# Altium PCB PCB1.pcbdoc
Units mil, origin at the board's own origin, x right, y up, seen from the top; angles counter-clockwise.
Board outline 2469.25 x 4325 mil, 2 copper layers (Top Layer, Bottom Layer); 51 components, 39 nets, 196 pads, 37 vias.
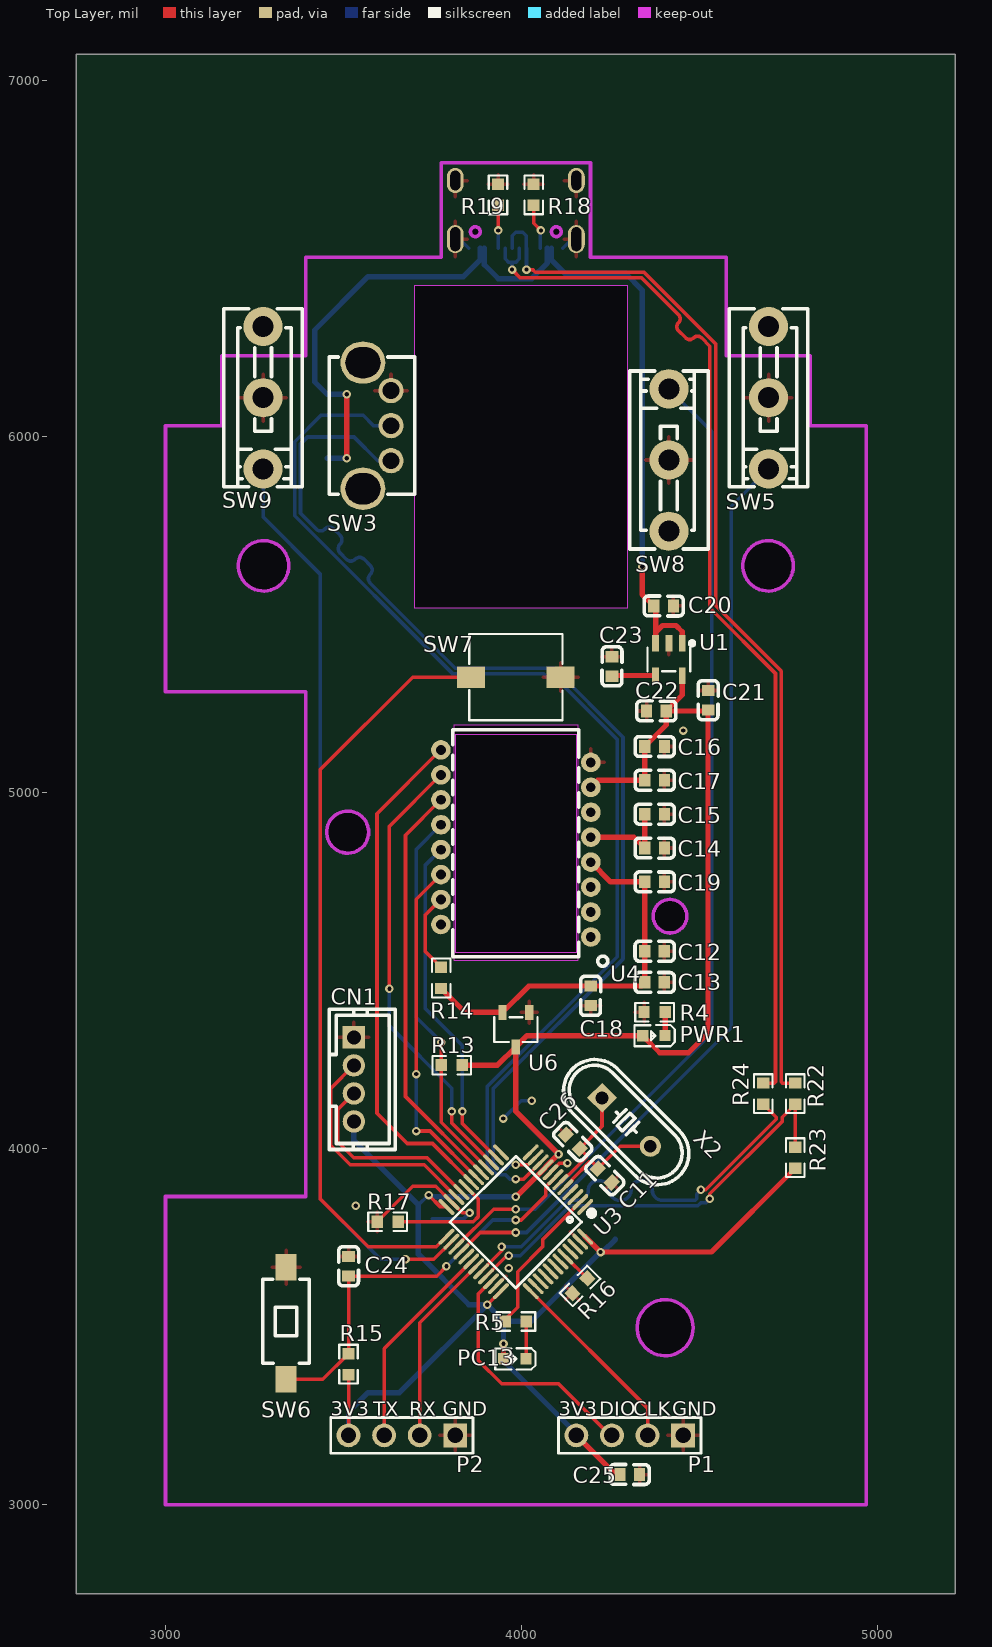
[diagram p0: Top Layer view]
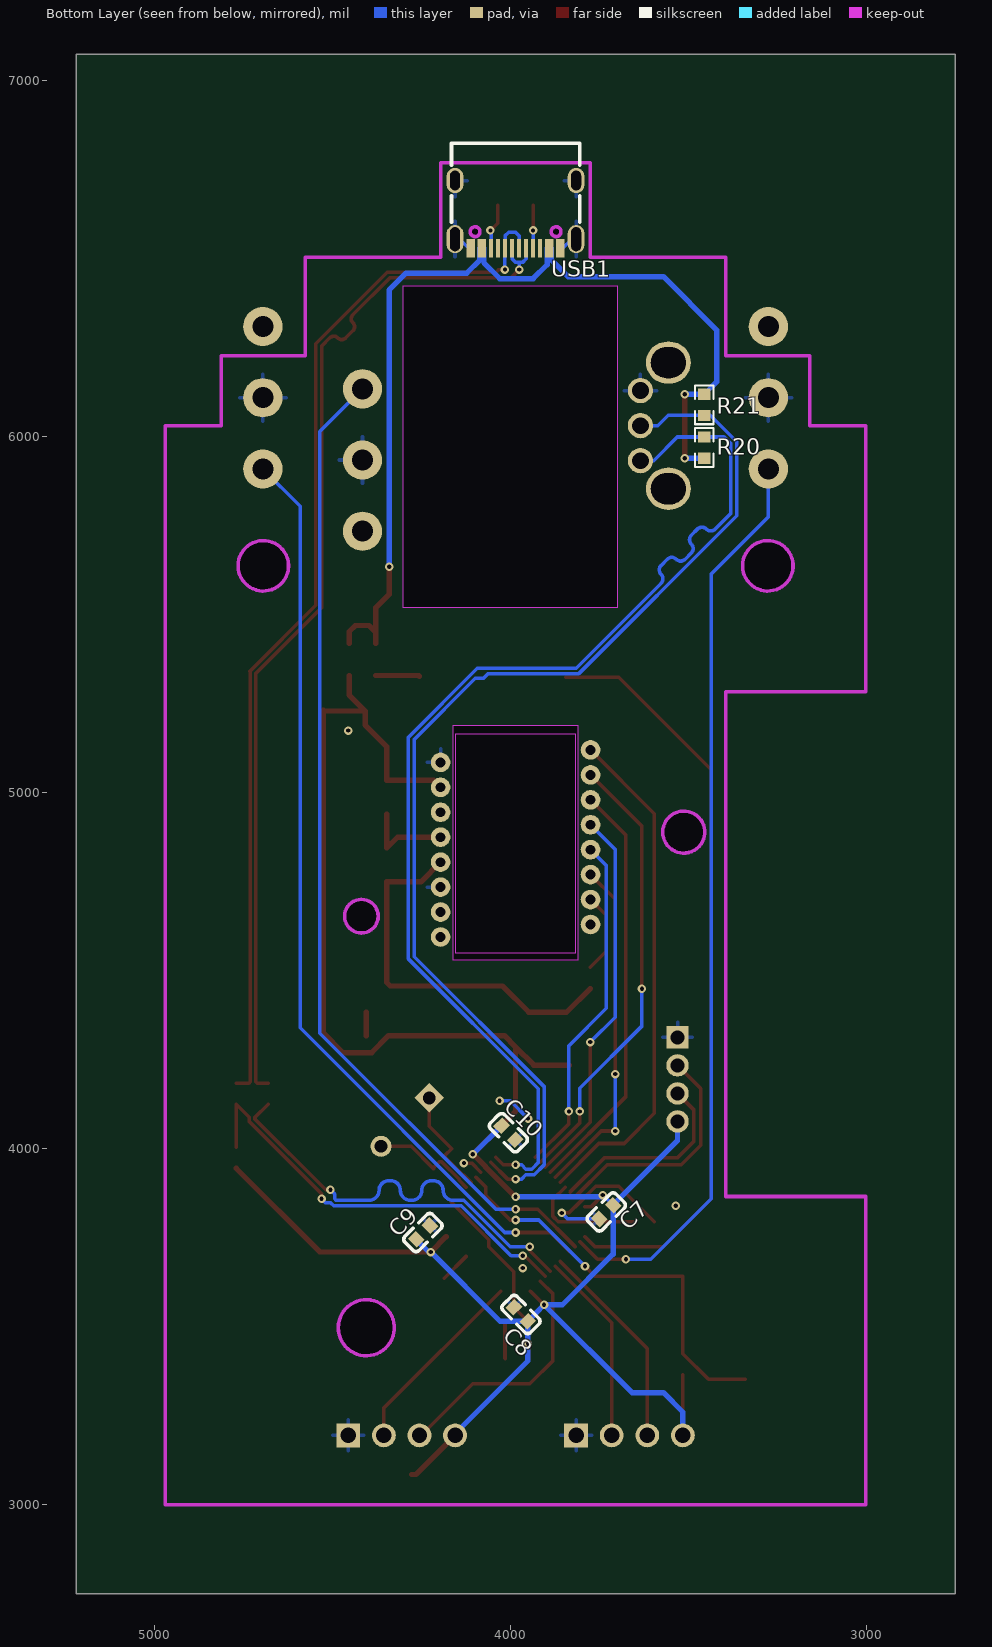
[diagram p1: Bottom Layer view, seen from below]

## Layer stack, top to bottom
Top Layer: signal copper (thickness not stored)
Dielectric: dielectric 12.6, FR-4, Dk 4.8
Bottom Layer: signal copper (thickness not stored)

## Board outline
5219.25,2750 2750,2750 2750,7075 5219.25,7075
cut-out: 4764.53,5637.8 ccw(c4693.66,5637.22) 4622.8,5637.8 ccw(c4693.66,5638.37)
cut-out: 3347.2,5637.8 ccw(c3276.34,5637.8) 3205.47,5637.8 ccw(c3276.34,5637.8)
cut-out: 3571.61,4889.76 ccw(c3512.56,4889.76) 3453.5,4889.76 ccw(c3512.56,4889.76)
cut-out: 4465.31,4653.54 ccw(c4418.07,4653.15) 4370.83,4653.54 ccw(c4418.07,4653.93)
cut-out: 4483.07,3497.44 ccw(c4404.33,3497.44) 4325.59,3497.44 ccw(c4404.33,3497.44)
cut-out: 3700.04,5519.69 4299.96,5519.69 4299.96,6425.2 3700.04,6425.2
cut-out: 3810,4530 4160,4530 4160,5190 3810,5190

## Design rules (kind name [scope] priority, off if disabled: settings)
Clearance copperThickness1oz [All] p1: gap=7 ignorepadtopadclearanceinfootprint=FALSE except(4: Track-Track; 6: Track-SMDPad SMDPad-SMDPad Track-THPad SMDPad-THPad THPad-THPad Track-Via SMDPad-Via THPad-Via Via-Via Track-Fill SMDPad-Fill THPad-Fill Via-Fill Fill-Fill SMDPad-Region THPad-Region Via-Region Fill-Region Region-Region Track-Poly SMDPad-Poly THPad-Poly Via-Poly Fill-Poly Poly-Poly Track-Text SMDPad-Text THPad-Text Via-Text Fill-Text Region-Text Poly-Text Text-Text Track-Hole SMDPad-Hole THPad-Hole Via-Hole Fill-Hole Region-Hole Poly-Hole Text-Hole; 11.8: Track-Region Region-Poly Track-Sheet SMDPad-Sheet THPad-Sheet Via-Sheet Fill-Sheet Region-Sheet Poly-Sheet Text-Sheet Sheet-Hole)
Clearance copperThickness2oz [All] p1: gap=7 ignorepadtopadclearanceinfootprint=FALSE except(6: Track-SMDPad SMDPad-SMDPad Track-THPad SMDPad-THPad THPad-THPad Track-Via SMDPad-Via THPad-Via Via-Via Track-Fill SMDPad-Fill THPad-Fill Via-Fill Fill-Fill SMDPad-Region THPad-Region Via-Region Fill-Region Region-Region Track-Poly SMDPad-Poly THPad-Poly Via-Poly Fill-Poly Poly-Poly Track-Text SMDPad-Text THPad-Text Via-Text Fill-Text Region-Text Poly-Text Text-Text Track-Hole SMDPad-Hole THPad-Hole Via-Hole Fill-Hole Region-Hole Poly-Hole Text-Hole; 8: Track-Track; 11.8: Track-Region Region-Poly Track-Sheet SMDPad-Sheet THPad-Sheet Via-Sheet Fill-Sheet Region-Sheet Poly-Sheet Text-Sheet Sheet-Hole)
DiffPairsRouting differentialPair [All] p1: maxuncoupledlength=10 maxlimit=6 mostfreqgap=6 toplayer_minwidth=5 toplayer_prefwidth=10 toplayer_maxwidth=100 bottomlayer_minwidth=5 bottomlayer_prefwidth=10 bottomlayer_maxwidth=100
PasteMaskExpansion pasteMaskExpansion [All] p1:
PlaneConnect innerPlane [All] p1: planeconnectstyle=Relief reliefexpansion=20 reliefentries=4 reliefconductorwidth=10 reliefairgap=10
PolygonConnect copperRegion [All] p1: connectstyle=Relief reliefentries=4 reliefconductorwidth=10 polygonreliefangle="90 Angle" airgapwidth=10
RoutingVias viaSize [All] p1: viastyle="Through Hole" holewidth=12.0078 minholewidth=11.811 maxholewidth=248.0314 width=24.0158 minwidth=19.685 maxwidth=393.7008
SolderMaskExpansion solderMaskExpansion [All] p1: useseparateexpansions=TRUE expansion=2 expansionbottom=2
Width copperThickness1oz [All] p1: maxlimit=100 minlimit=5 preferedwidth=10
Width copperThickness2oz [All] p1: maxlimit=100 minlimit=8 preferedwidth=10

## Components (designator, comment, footprint, x,y, rotation, side; value= is the part's Value field where it differs from the comment)
C7 "0603B104K500NT" C0603 3730.51,3822.49 r315 bottom
C8 "0603B104K500NT" C0603 3970,3535 r45 bottom
C9 "0603B104K500NT" C0603 4245,3765 r135 bottom
C10 "0603B104K500NT" C0603 4005,4045 r225 bottom
C11 "0603B104K500NT" C0603 4235,3925 r135 top
C12 "CAP_0603" C0603 4374.54,4555 r180 top
C13 "CAP_0603" C0603 4374.54,4467.57 r180 top
C14 "CAP_0603" C0603 4374.69,4845.05 r180 top
C15 "CAP_0603" C0603 4374.69,4940.11 r180 top
C16 "CAP_0603" C0603 4374.69,5130.21 r180 top
C17 "CAP_0603" C0603 4374.69,5035.16 r180 top
C18 "CAP_0603" C0603 4195,4430 r90 top
C19 "CAP_0603" C0603 4374.69,4750 r180 top
C20 "0603B104K500NT" C0603 4400,5525 r180 top
C21 "0603B104K500NT" C0603 4525,5260 r270 top
C22 "0603B104K500NT" C0603 4380,5230 r0 top
C23 "0603B104K500NT" C0603 4255,5355 r270 top
C24 "0603B104K500NT" C0603 3515,3670 r270 top
C25 "0603B104K500NT" C0603 4305,3085 r0 top
C26 "0603B104K500NT" C0603 4145,4020 r315 top
CN1 "PH-4A_C2908625" CONN-TH_4P-P2.00_PH-4A_C2908625 3530,4195 r270 top
P1 "HEADER_1*4P" HDR-TH_4P-P2.54-V-M-1 4305,3195 r180 top
P2 "HEADER_1*4P" HDR-TH_4P-P2.54-V-M-1 3665,3195 r180 top
PC13 "LED_0603-B" LED_0603 3980,3410 r180 top
PWR1 "LED_0603-R" LED_0603 4370.89,4317.61 r180 top
R4 "0603WAF1002T5E" R0603 4374.84,4384.08 r0 top
R5 "0603WAF1002T5E" R0603 3985,3515 r0 top
R13 "Res_0603" R0603 3805,4235 r0 top
R14 "Res_0603" R0603 3775,4480 r270 top
R15 "0603WAF1002T5E" R0603 3515,3395 r270 top
R16 "0603WAF1002T5E" R0603 4165,3615 r45 top
R17 "0603WAF1002T5E" R0603 3625,3795 r0 top
R18 "Res_0603" R0603 4035,6680 r270 top
R19 "Res_0603" R0603 3935,6680 r90 top
R20 "Res_0603" R0603 3455,5970 r270 bottom
R21 "Res_0603" R0603 3455,6090 r90 bottom
R22 "0603WAF1002T5E" R0603 4770,4155 r270 top
R23 "0603WAF1002T5E" R0603 4770,3975 r90 top
R24 "0603WAF1002T5E" R0603 4680,4155 r270 top
SW3 "EC10E1220501" SW-TH_EC10EXXXXXXX 3595,6031.5 r90 top
SW5 "K9-1267T" SW-TH_K9-1267T 4695,6110 r270 top
SW6 "TS-1101-C-W" SW-SMD_L6.0-W3.3-LS8.0 3340,3510 r270 top
SW7 "TS665WS_C398058" SW-SMD_L6.0-W6.0-LS6.6 3985,5325 r180 top
SW8 "K9-1267T" SW-TH_K9-1267T 4415,5935 r90 top
SW9 "K9-1267T" SW-TH_K9-1267T 3275,6110 r270 top
U1 "RT9193-33GB" SOT-23-5_L3.0-W1.7-P0.95-LS2.8-BL 4415,5375 r180 top
U3 "STM32F103C8T6" LQFP-48_L7.0-W7.0-P0.50-LS9.0-BL 3985,3795 r135 top
U4 "PAW3395DM-T6QU" DIP-16_PAW3395DM-T6QU 3985,4857.87 r180 top
U6 "CE6219P33M" SOT-23-3_L2.9-W1.6-P1.90-LS2.8-BR 3985,4335 r90 top
USB1 "typec" USB-C-SMD_KH-TYPE-C-16P 3985,6625 r0 bottom
X2 "XIHCELNANF-8MHZ" HC-49US_L11.5-W4.5-P4.88 4295,4075 r315 top

## Footprints (in the part's own frame and the unit in brackets; to place one, negate y for a bottom-side part, rotate by r counter-clockwise, add the part's x,y. Pads: shape width x height; smd on the part's side, far side on the other; paste and mask are expansions set on the pad)
C0603 [mm]
  rect 0.8x0.9 smd: 1(-0.7,0) 2(0.7,0)
  silkscreen extent -1.41,-0.71 1.39,0.72
CONN-TH_4P-P2.00_PH-4A_C2908625 [mm]
  rect 1.6x1.6 hole 1: 1(-3,0)
  round 1.6 hole 1: 2(-1,0) 3(1,0) 4(3,0)
  silkscreen extent -5,-1.75 5,2.95
DIP-16_PAW3395DM-T6QU [mm]
  round 1.4 hole 0.7: 1(-5.35,6.675) 2(-5.35,4.895) 3(-5.35,3.115) 4(-5.35,1.335) 5(-5.35,-0.445) 6(-5.35,-2.225) 7(-5.35,-4.005) 8(-5.35,-5.785) 9(5.35,-6.675) 10(5.35,-4.895) 11(5.35,-3.115) 12(5.35,-1.335) 13(5.35,0.445) 14(5.35,2.225) 15(5.35,4.005) 16(5.35,5.785)
  Multi-Layer board cut-out: -4.3,-7.805 -4.3,7.805 4.3,7.805 4.3,-7.805
  Multi-Layer keep-out region: -4.3,-7.805 -4.3,7.805 4.3,7.805 4.3,-7.805
  silkscreen extent -6.56,-8.1 4.5,8.76
HC-49US_L11.5-W4.5-P4.88 [mm]
  rect 1.5x1.5 hole 0.9: 1(-2.44,0)
  round 1.5 hole 0.9: 2(2.44,0)
  silkscreen extent -5.39,-2.25 5.39,2.25
HDR-TH_4P-P2.54-V-M-1 [mm]
  rect 1.7x1.7 hole 1.1: 1(-3.81,0)
  round 1.7 hole 1.1: 2(-1.27,0) 3(1.27,0) 4(3.81,0)
  silkscreen extent -5.08,-1.27 5.08,1.27
LED_0603 [mil]
  rect 31.5x31.5 smd: 1(-33.5,-0.4) 2(29.5,-0.2)
  silkscreen extent -61,-30 53,30
LQFP-48_L7.0-W7.0-P0.50-LS9.0-BL [mm]
  oval 0.27x1.5 smd: 1(-2.75,-4.25) 2(-2.25,-4.25) 3(-1.75,-4.25) 4(-1.25,-4.25) 5(-0.75,-4.25) 6(-0.25,-4.25) 7(0.25,-4.25) 8(0.75,-4.25) 9(1.25,-4.25) 10(1.75,-4.25) 11(2.25,-4.25) 12(2.75,-4.25) 25(2.75,4.25) 26(2.25,4.25) 27(1.75,4.25) 28(1.25,4.25) 29(0.75,4.25) 30(0.25,4.25) 31(-0.25,4.25) 32(-0.75,4.25) 33(-1.25,4.25) 34(-1.75,4.25) 35(-2.25,4.25) 36(-2.75,4.25)
  oval 1.5x0.27 smd: 13(4.25,-2.75) 14(4.25,-2.25) 15(4.25,-1.75) 16(4.25,-1.25) 17(4.25,-0.75) 18(4.25,-0.25) 19(4.25,0.25) 20(4.25,0.75) 21(4.25,1.25) 22(4.25,1.75) 23(4.25,2.25) 24(4.25,2.75) 37(-4.25,2.75) 38(-4.25,2.25) 39(-4.25,1.75) 40(-4.25,1.25) 41(-4.25,0.75) 42(-4.25,0.25) 43(-4.25,-0.25) 44(-4.25,-0.75) 45(-4.25,-1.25) 46(-4.25,-1.75) 47(-4.25,-2.25) 48(-4.25,-2.75)
  silkscreen extent -3.59,-4.46 3.3,3.34
R0603 [mil]
  rect 31.75x34.02 smd: 1(-29.66,0) 2(29.66,0)
  silkscreen extent -55,-26 55,26
SOT-23-3_L2.9-W1.6-P1.90-LS2.8-BR [mm]
  rect 1.07x0.6 smd: 1(1.235,-0.95) 2(1.235,0.95) 3(-1.235,0)
  silkscreen extent -0.88,-1.54 0.88,1.54
SOT-23-5_L3.0-W1.7-P0.95-LS2.8-BL [mm]
  rect 0.49x1.157 smd: 1(-0.95,-1.154) 2(0,-1.154) 3(0.95,-1.154)
  rect 0.49x1.175 smd: 4(0.95,1.154) 5(-0.95,1.154)
  silkscreen extent -1.8,-1.29 1.53,0.85
SW-SMD_L6.0-W3.3-LS8.0 [mm]
  rect 1.9x1.5 smd: 1(-4,0) 2(4,0)
  silkscreen extent -3.14,-1.67 2.86,1.63
SW-SMD_L6.0-W6.0-LS6.6 [mm]
  rect 1.985x1.512 smd: 1(-3.193,0) 2(3.193,0)
  silkscreen extent -3.33,-3.08 3.33,3.08
SW-TH_EC10EXXXXXXX [mm]
  oval 3x3.2 hole 2.2 slot 2.5 at 90 deg: 4(-4.5,1) 5(4.5,1)
  round 1.8 hole 1.2: A(-2.5,-1) B(0,-1) C(2.5,-1)
  silkscreen extent -4.9,-2.7 4.9,3.4
SW-TH_K9-1267T [mil]
  round 110.24 hole 59.06: 1(-200,0) 2(0,0) 3(200,0)
  silkscreen extent -250,-110 250,110
USB-C-SMD_KH-TYPE-C-16P [mm]
  oval 1.2x2 hole 0.7 slot 1.7 at 90 deg: 1(-4.32,1.765) 2(4.32,1.765)
  oval 1.2x1.8 hole 0.7 slot 1.4 at 90 deg: 3(-4.32,-2.415) 4(4.32,-2.415)
  rect 0.3x1.3 smd: A1(-3.35,2.415) A4(-2.55,2.415) A5(-1.25,2.415) A6(-0.25,2.415) A7(0.25,2.415) A8(1.25,2.415) A9(2.55,2.415) A12(3.35,2.415) B1(3.05,2.415) B4(2.25,2.415) B5(1.75,2.415) B6(0.75,2.415) B7(-0.75,2.415) B8(-1.75,2.415) B9(-2.25,2.415) B12(-3.05,2.415)
  Multi-Layer board cut-out: -2.54,1.235 -2.575,1.083 -2.672,0.961 -2.812,0.894 -2.968,0.894 -3.108,0.961 -3.205,1.083 -3.24,1.235 -3.24,1.235 -3.205,1.387 -3.108,1.509 -2.968,1.576 -2.812,1.576 -2.672,1.509 -2.575,1.387 -2.54,1.235
  Multi-Layer board cut-out: 3.24,1.235 3.205,1.083 3.108,0.961 2.968,0.894 2.812,0.894 2.672,0.961 2.575,1.083 2.54,1.235 2.54,1.235 2.575,1.387 2.672,1.509 2.812,1.576 2.968,1.576 3.108,1.509 3.205,1.387 3.24,1.235
  Multi-Layer keep-out circle w0.254: c-2.89,1.235 r0.35
  Multi-Layer keep-out circle w0.254: c2.89,1.235 r0.35
  silkscreen extent -4.57,-5.08 4.57,0.57

## Via types
v1: diameter 24.02, hole 12.01, Top Layer to Bottom Layer, 37 vias

## Nets (pads, with @x,y where several pads share a name; then routed paths per layer and width w, separated by ;. In a path a pad name is that pad's centre, name@x,y a point inside that pad or via, vN(x,y) a via of type N, cw(c..) or ccw(c..) an arc to the next point about the centre after c; other vN are vias at no path point)
3.3V: 
5V: C20.2 R20.2 R21.2 U1.1 U1.3 USB1.A4 USB1.A9 USB1.B4 USB1.B9 | length 2815.1
  Top Layer w15: v1(3510,5940.34) v1(3510,6119.66) ; v1(4340,5635) 4340,5557.44 C20.2 4377.6,5519.84 4377.6,5450.7 ; U1.3 4377.6,5450.7 ; U1.1 4452.4,5452.6 4435,5470 4396.9,5470 4377.6,5450.7
  Bottom Layer w15: R20.2 v1(3510,5940.34) ; v1(3510,6119.66) R21.2 3420,6154.66 3420,6300 3570,6450 3837.78,6450 3884.61,6496.83 USB1.A4 ; USB1.B9 3896.42,6483.58 3935.49,6444.51 4029.51,6444.51 4073.58,6488.58 USB1.B4 ; USB1.A9 4085.4,6496.84 4122.24,6460 4292.45,6460 4340,6412.45 v1(4340,5635)
$1N305: R22.2 R23.2 U3.33 | length 1204.3
  Top Layer w10: U3.33 3959.59,3700 v1(3965,3700) ; v1(4530,3860) 4530,3873.71 4733,4076.71 4733,4088.34 R22.2 R23.2
  Bottom Layer w10: v1(3965,3700) 3997.63,3700 4137.38,3839.75 4496.07,3839.75 4504.29,3847.97 4517.97,3847.97 v1(4530,3860)
$1N307: R24.2 U3.32 | length 1203.9
  Top Layer w10: U3.32 3945,3713.24 v1(3945,3725) ; v1(4505,3885) 4518.66,3885 4717,4083.34 4717,4088.34 R24.2
  Bottom Layer w10: v1(3945,3725) 4000,3725 4130.75,3855.75 4161.12,3855.75 ccw(c4161.12,3883.15) 4188.52,3883.15 cw(c4215.92,3883.15) 4215.92,3910.55 4221.12,3910.55 cw(c4221.12,3883.15) 4248.52,3883.15 ccw(c4275.92,3883.15) 4275.92,3855.75 4281.12,3855.75 ccw(c4281.12,3883.15) 4308.52,3883.15 cw(c4335.92,3883.15) 4335.92,3910.55 4341.12,3910.55 cw(c4341.12,3883.15) 4368.52,3883.15 ccw(c4395.92,3883.15) 4395.92,3855.75 4489.44,3855.75 4492.97,3859.29 4492.97,3872.97 v1(4505,3885)
$1N931: C14.2 C15.2 U4.5 | length 259.1
  Top Layer w15: U4.5 4316.8,4875.39 C14.2 C15.2
$1N949: R14.1 U4.15 | length 227.5
  Top Layer w10: U4.15 3730,4655.82 3730,4554.66 R14.1
$1N1765: C23.2 U1.4 | length 123.5
  Top Layer w15: C23.2 4257.14,5329.58 U1.4
$1N2049: R16.2 U3.44 | length 87.3
  Top Layer w10: U3.44 4185.79,3635.97 R16.2
$1N2683: PWR1.1 R4.2 | length 66.1
  Top Layer w15: PWR1.1 4404.39,4383.97 R4.2
$1N2684: PC13.1 R5.2 | length 105.1
  Top Layer w10: PC13.1 4014.66,3411.56 R5.2
$1N2744: R17.2 U3.20 | length 328.1
  Top Layer w10: R17.2 3865,3795 3880,3810 3880,3858.24 U3.20
$1N4926: R18.2 USB1.B5 | length 128.9
  Top Layer w10: R18.2 4035,6600.57 v1(4055.57,6580)
  Bottom Layer w10: USB1.B5 v1@4053.9,6580
$1N5073: R19.1 USB1.A5 | length 120.7
  Top Layer w10: R19.1 3935,6580.79 v1(3935.79,6580)
  Bottom Layer w10: USB1.A5 v1(3935.79,6580)
ENC_1: R20.1 SW3.A U3.11 | length 3184.5
  Top Layer w10: v1(3985,3955) 4019.73,3955 U3.11
  Bottom Layer w10: SW3.A@3599.37,5933.07 3596.93,5933.07 3530.34,5999.66 R20.1 3399.66,5999.66 3380,5980 3380,5785 3423.85,5741.15 ccw(c3436.35,5753.65) 3448.85,5741.15 cw(c3461.35,5728.65) 3473.85,5741.15 3491.27,5723.73 cw(c3478.77,5711.23) 3491.27,5698.73 ccw(c3503.77,5686.23) 3491.27,5673.73 3508.7,5656.3 ccw(c3521.2,5668.8) 3533.7,5656.3 cw(c3546.2,5643.8) 3558.7,5656.3 3576.12,5638.88 cw(c3563.62,5626.38) 3576.12,5613.88 ccw(c3588.62,5601.38) 3576.12,5588.88 3815,5350 4092.63,5350 4286,5156.63 4286,4533.37 3921,4168.37 3921,3961.36 3939.36,3943 3955.99,3943 3967.99,3955 v1(3985,3955)
ENC_2: R21.1 SW3.B U3.10 | length 3184.4
  Top Layer w10: v1(3985,3915) 4007.56,3915 U3.10
  Bottom Layer w10: SW3.B@3599.37,6031.49 3585.23,6031.49 3556.38,6060.34 R21.1 3437.71,6060.34 3364,5986.63 3364,5778.37 3808.37,5334 4063.01,5334 4075.01,5322 4098,5322 4270,5150 4270,4540 3905,4175 3905,3954.74 3932.74,3927 3955.99,3927 3967.99,3915 v1(3985,3915)
GND: C7.2 C8.2 C9.2 C10.2 C11.1 C12.1 C13.1 C14.1 C15.1 C16.1 C17.1 C18.1 C19.1 C20.1 C21.1 C22.1 C23.1 C24.1 C25.2 C26.1 CN1.1 P1.1 P2.1 R4.1 R16.1 R17.1 R18.1 R19.2 SW3.C SW5.2 SW6.1 SW7.1 SW8.2 SW9.2 U1.2 U3.8 U3.23 U3.35 U3.47 U4.3 U4.8 U6.1 USB1.1 USB1.2 USB1.3 USB1.4 USB1.A1 USB1.A12 USB1.B1 USB1.B12 | length 700.7
  Top Layer w10: R17.1 3695.34,3895 3759.73,3895 U3.23 3834.73,3820 v1(3855,3820) ; U3.8 4108.24,3960 v1(4130,3960)
  Bottom Layer w10: C7.2 3838,3803 v1(3855,3820) ; USB1.1 3827.52,6555.51 USB1.A1 ; v1(3950,4085) 4000,4135 v1(4030,4135) ; USB1.A12 4142.48,6555.51 USB1.2
  other v1: 3965,3665 3535,3840 4455,5175
MISO: R13.1 U3.16 U4.12 | length 1072.4
  Top Layer w10: v1(3775,4300) 3775,4074.59 U3.16
  Bottom Layer w10: U4.12 3705,4841.06 3705,4370 v1(3775,4300)
MOSI: U3.17 U4.11 | length 1175.5
  Top Layer w10: U4.11 3675,4881.14 3675,4146.76 U3.17
MOTION: U3.19 U4.9 | length 1439.9
  Top Layer w10: U4.9 3595,4941.3 3595,4100 3680,4015 3751.08,4015 U3.19
NRESET: U3.18 U4.14 | length 971.4
  Top Layer w10: v1(3705,4050) 3743.92,4050 U3.18 ; v1(3705,4210) 3705,4700.9 U4.14
  Bottom Layer w10: v1(3705,4050) v1(3705,4210)
NSS: U3.14 U4.13 | length 965.3
  Top Layer w10: v1(3835,4105) 3835,4070.27 U3.14
  Bottom Layer w10: U4.13 3730,4795.98 3730,4395 3835,4290 v1(3835,4105)
OSCIN: C11.2 U3.5 X2.2 | length 305.5
  Top Layer w10: U3.5 4143.59,3911.83 4143.59,3914.44 4193.33,3964.17 4198.33,3964.17 4215.51,3946.99 C11.2 4278.1,4007.08 X2.2
OSCOUT: C26.2 U3.6 X2.1 | length 302
  Top Layer w10: U3.6 4129.67,3925.76 4132.28,3925.76 4183.26,3976.74 4183.26,3981.74 C26.2 4227.08,4063.1 X2.1
PA9/TX: P2.3 U3.30 | length 590
  Top Layer w10: P2.3 3615,3438.92 U3.30
PA10/RX: P2.2 U3.31 | length 540.4
  Top Layer w10: P2.2 3715,3511.08 U3.31
PB10: CN1.3 U3.21 | length 559.8
  Top Layer w10: CN1.3 3485,4110.63 3485,4020 3530,3975 3735.41,3975 U3.21
PB11: CN1.2 U3.22 | length 664.5
  Top Layer w10: CN1.2 3465,4169.37 3465,4010 3520,3955 3727.56,3955 U3.22
PB12: SW7.2 U3.25 | length 2144.8
  Top Layer w10: U3.25 3761.88,3725 3570,3725 3435,3860 3435,5065 3695,5325 SW7.2@3844.31,5325
PB13: SW9.3 U3.26 | length 2576.2
  Top Layer w10: v1(3675,3690) 3754.73,3690 U3.26
  Bottom Layer w10: SW9.3 3275,5775 3435,5615 3435,3860 3605,3690 v1(3675,3690)
PB14: SW8.3 U3.27 | length 2825.1
  Top Layer w10: U3.27 3922.56,3830 v1(3985,3830)
  Bottom Layer w10: v1(3985,3830) 4040,3830 4535,4325 4535,6015 SW8.3
PB15: SW5.3 U3.28 | length 2631.9
  Top Layer w10: U3.28 3885.41,3765 v1(3985,3765)
  Bottom Layer w10: v1(3985,3765) 4015,3765 4590,4340 4590,5805 SW5.3
PC13: R5.1 U3.2 | length 424.6
  Top Layer w10: R5.1@3950.34,3515.34 3990,3555 3990,3655 4060,3725 4060,3744.73 U3.2
RESET: C24.2 R15.1 SW6.2 U3.7 | length 1133.1
  Top Layer w10: SW6.2 3442.86,3352.52 R15.1 C24.2 3762.44,3642.44 v1(3790,3670) ; v1(3985,3800) 4000,3800 4068.92,3868.92 4068.92,3892.84 U3.7
  Bottom Layer w10: v1(3790,3670) 3920,3800 v1(3985,3800)
SCK: U3.15 U4.10 | length 1266.6
  Top Layer w10: v1(3630,4450) 3630,4906.22 U4.10 ; v1(3805,4105) 3805,4072.44 U3.15
  Bottom Layer w10: v1(3630,4450) 3630,4345 3805,4170 v1(3805,4105)
SWDCLK: P1.2 U3.37 | length 540.8
  Top Layer w10: U3.37 4355,3271.88 4355,3208.67 P1.2@4345.51,3199.18
SWDIO: P1.3 U3.34 | length 688.6
  Top Layer w10: U3.34 3880,3592.56 3880,3405 3945,3340 4105,3340 4245.51,3199.49 P1.3@4245.51,3199.18
USB_D+: R22.1 USB1.A6 USB1.B6 | length 2986.8
  Top Layer w10: v1(4015,6470) 4032.01,6470 4039.5,6462.51 4345.12,6462.51 4546,6261.63 4546,5526.63 4730.5,5342.13 ; 4731,5341.63 4730.5,5342.13 ; R22.1 4734.04,4184.66 4730.5,4188.2 4730.5,5342.13
  Bottom Layer w10: USB1.A6 3975.16,6565 3985.16,6575 4004.53,6575 4014.53,6565 USB1.B6 4015,6529.45 v1(4015,6470)
USB_D-: R24.1 USB1.A7 USB1.B7 | length 2987.8
  Top Layer w10: v1(3974.29,6470) 3997.79,6446.51 4338.49,6446.51 4441.99,6343.01 cw(c4430.74,6331.76) 4441.99,6320.51 ccw(c4453.24,6309.26) 4441.99,6298.01 4461.91,6278.09 ccw(c4473.16,6289.34) 4484.41,6278.09 cw(c4495.66,6266.84) 4506.91,6278.09 4530,6255 4530,5520 4714.5,5335.5 4714.5,4188.2 4710.96,4184.66 R24.1
  Bottom Layer w10: USB1.B7 3955.47,6500 3965.47,6490 3974.29,6490 ; v1(3974.29,6470) 3974.29,6490 ; USB1.A7 3994.84,6500 3984.84,6490 3974.29,6490
VDD_1.9V: C12.2 C13.2 C18.2 C19.2 R14.2 U4.4 U6.2 | length 1091.3
  Top Layer w15: R14.2 3841.72,4383.62 U6.2 4021.53,4457.56 C18.2 4336.97,4457.56 C13.2 C12.2 4346.98,4749.84 C19.2 4250.94,4750 U4.4
pads on no net: C7.1 C8.1 C9.1 C10.1 C16.2 C17.2 C21.2 C22.2 C25.1 CN1.4 P1.4 P2.4 PC13.2 PWR1.2 R13.2 R15.2 R23.1 SW3.4 SW3.5 SW5.1 SW8.1 SW9.1 U1.5 U3.1 U3.3 U3.4 U3.9 U3.12 U3.13 U3.24 U3.29 U3.36 U3.38 U3.39 U3.40 U3.41 U3.42 U3.43 U3.45 U3.46 U3.48 U4.1 U4.2 U4.6 U4.7 U4.16 U6.3 USB1.A8 USB1.B8
copper on no net: | length 6569.4
  Top Layer w10: 3515,3195 3515,3365.34 ; v1(3740,3870) 3773.25,3836.75 3790.13,3836.75 ; v1(3905,3561.88) 3943.25,3600.13
  Top Layer w15: 3834.66,4235 3933.62,4235 3985,4286.38 ; v1(3950.34,3452.58) 3950.34,3410.36 3950.5,3410.2 ; v1(3985,3865) 3985.41,3865 4068.52,3948.11 4068.52,3948.52 v1(4105,3985) 3985,4105 3985,4286.38 ; 4155,3195 4265,3085 4277.44,3085 ; 4179.87,3753.25 v1(4223.12,3710) 4534.66,3710 4770,3945.34 ; 4195.63,5015.55 4215.24,5035.16 4347.14,5035.16 4347.14,5130.21 4407.56,5190.64 4407.56,5230 ; 4452.4,5329.58 4452.4,5274.84 4407.56,5230 ; 4525,5232.44 4525,5227.56 ; 3985,4286.38 4016.44,4317.81 4341.39,4317.81 4389.2,4270 4470,4270 4525,4325 4525,5227.56 ; 4407.56,5230 4522.56,5230 4525,5227.56
  Bottom Layer w10: 3711.02,3841.98 3739.05,3870 v1(3740,3870)
  Bottom Layer w15: 3515,3195 3515,3260 3570,3315 3658.12,3315 v1(3905,3561.88) ; 3530,4076.89 3530,4023 3711.02,3841.98 3711.02,3703.98 3853.12,3561.88 v1(3905,3561.88) ; v1(3740,3870) 3745,3865 v1(3985,3865) ; 4024.49,4064.49 4103.98,3985 v1(4105,3985) ; 4145.51,3199.18 4145.51,3209.49 3950.34,3404.66 v1(3950.34,3452.58) 3950.34,3515.34 ; 4264.49,3745.51 4228.98,3710 v1(4223.12,3710) 4028.63,3515.51 3950.51,3515.51 3950.34,3515.34 ; v1(3905,3561.88) 3950.34,3515.34

## Polygon pours and split planes (outlines as drawn)
GND on Bottom Layer (solid, remove dead copper, pour order 2): 3000,3000 4969.25,3000 4969.25,6770 3000,6770
GND on Top Layer (solid, remove dead copper): 3000,3000 4969.25,3000 4969.25,6770 3000,6770

## Keep-outs
Board Outline Layer:
  lines w10: 3000.75,3866.14 3000.75,3000 4969.25,3000 4969.25,6031.5 4812.4,6031.5 4812.4,6228.35 4575.55,6228.35 4575.55,6505 4194.66,6505 4194.66,6770.16 3775,6770.16 3775,6505 3394.45,6505 3394.45,6228.35 3158.23,6228.35 3158.23,6031.44 3000.75,6031.44 3000.75,5283.46 3394.45,5283.46 3394.45,3866.14 3000.75,3866.14 ; 3000.75,3866.14 3000.75,3866.14
Multi-Layer:
  circle w10: c4693.66,5637.8 r70.87
  circle w10: c3276.34,5637.8 r70.87
  circle w10: c3512.56,4889.76 r59.06
  circle w10: c4418.07,4653.54 r47.24
  circle w10: c4404.33,3497.44 r78.74
  region: 3700.04,5519.69 4299.96,5519.69 4299.96,6425.2 3700.04,6425.2
  region: 3810,4530 4160,4530 4160,5190 3810,5190

## Silkscreen, mask and mechanical layers (free items; w line width, h text height)
Top Silkscreen Layer:
  text "3V3" at 3465,3250 h40
  text "TX" at 3585,3250 h40
  text "RX" at 3685,3250 h40
  text "GND" at 3780,3250 h40
  text "3V3" at 4104.95,3250.05 h40
  text "DIO" at 4220,3250 h40
  text "CLK" at 4315,3250 h40
  text "GND" at 4425,3250 h40
Mechanical Layer:
  circle w1: c4693.66,5637.8 r70.87
  circle w1: c3276.34,5637.8 r70.87
  circle w1: c3512.56,4889.76 r59.06
  circle w1: c4418.07,4653.54 r47.24
  circle w1: c4404.33,3497.44 r78.74
  lines w1: 3700.04,5519.69 4299.96,5519.69 4299.96,6425.2 3700.04,6425.2 3700.04,5519.69 ; 3810,4530 4160,4530 4160,5190 3810,5190 3810,4530